# Altium PCB OpenUltrasound_Pulser.PcbDoc
Units mil, origin at the board's own origin, x right, y up, seen from the top; angles counter-clockwise.
Board outline 3533.46 x 2372.05 mil, 2 copper layers (Top Layer, Bottom Layer); 79 components, 64 nets, 307 pads, 84 vias.
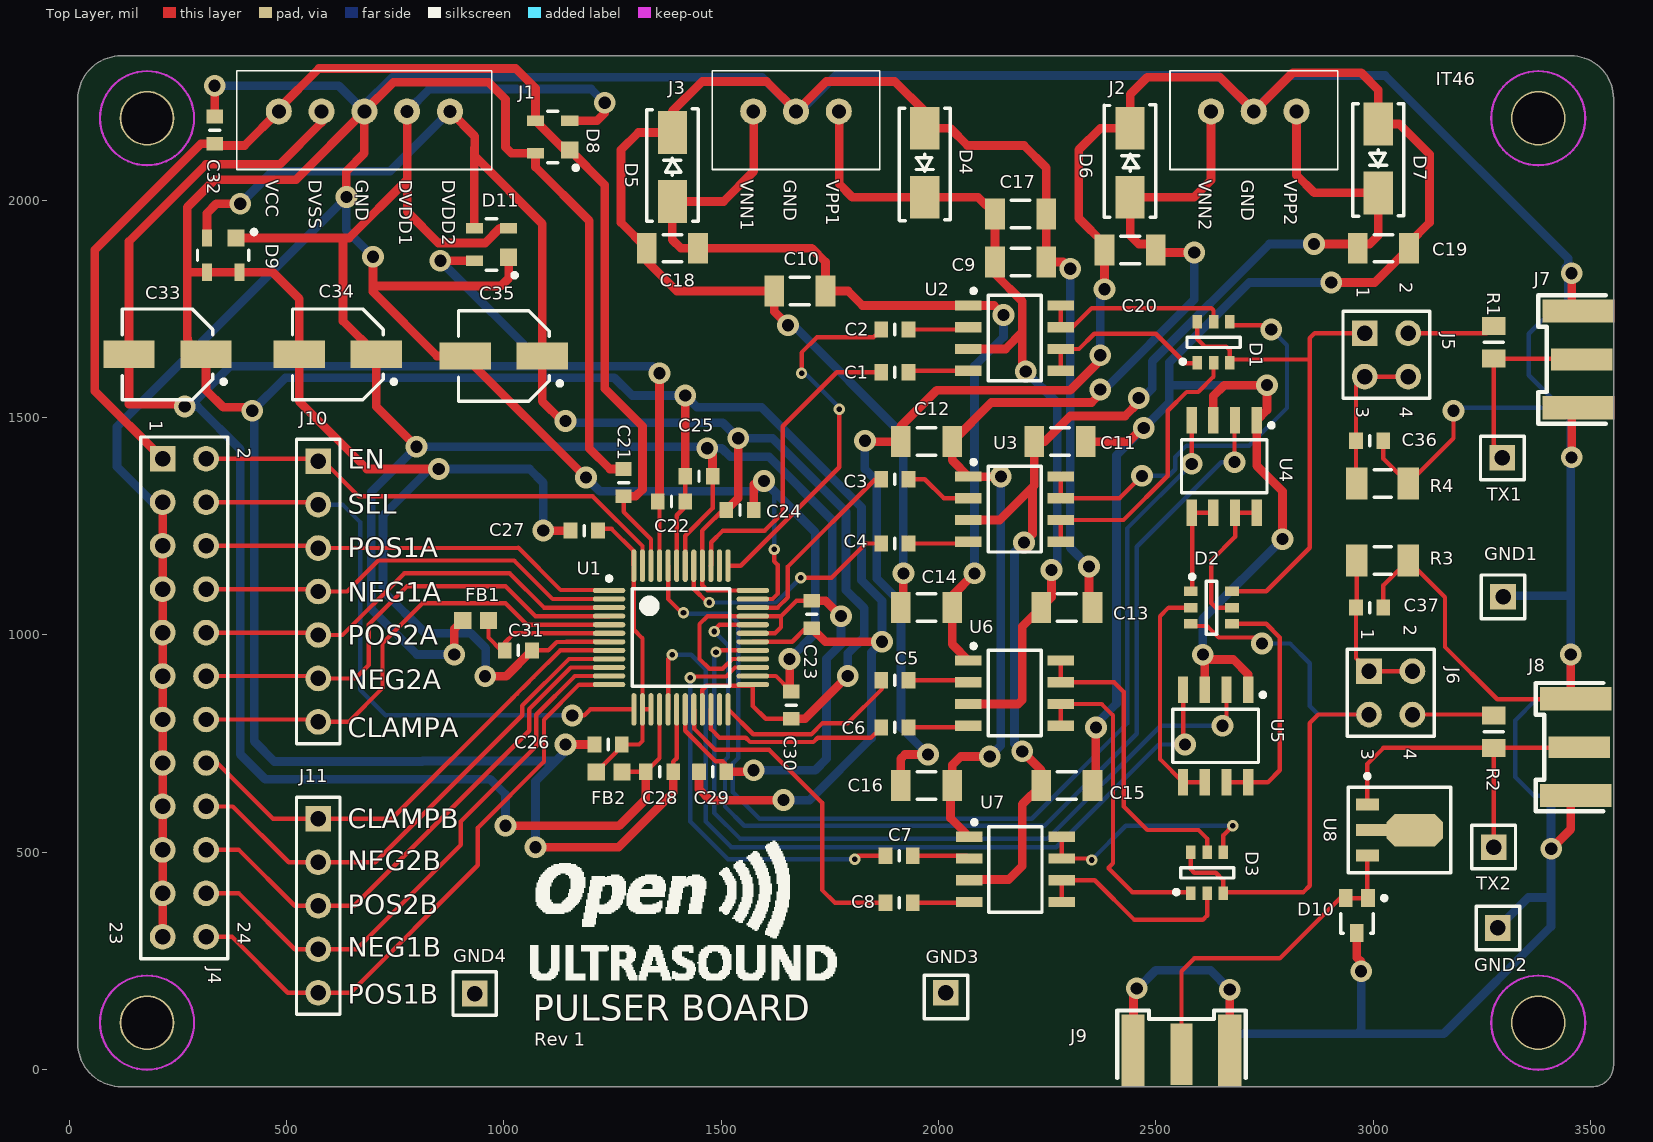
[diagram p0: Top Layer view]
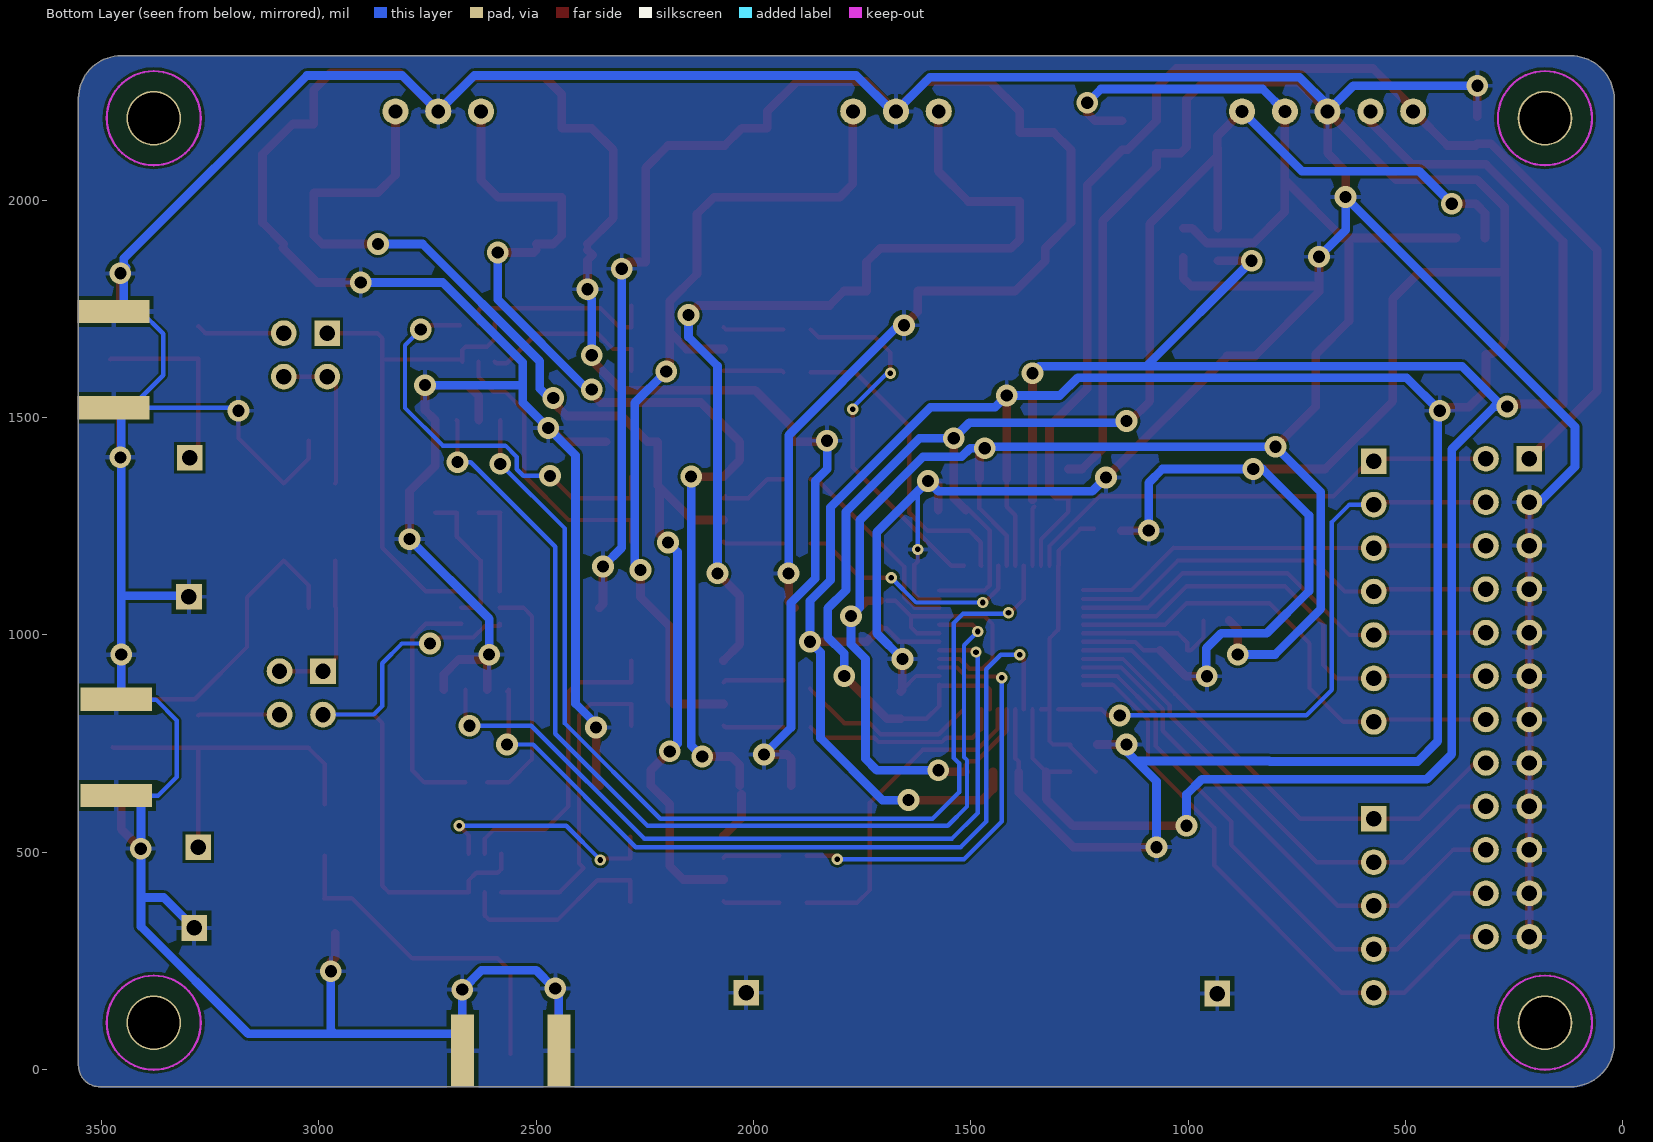
[diagram p1: Bottom Layer view, seen from below]
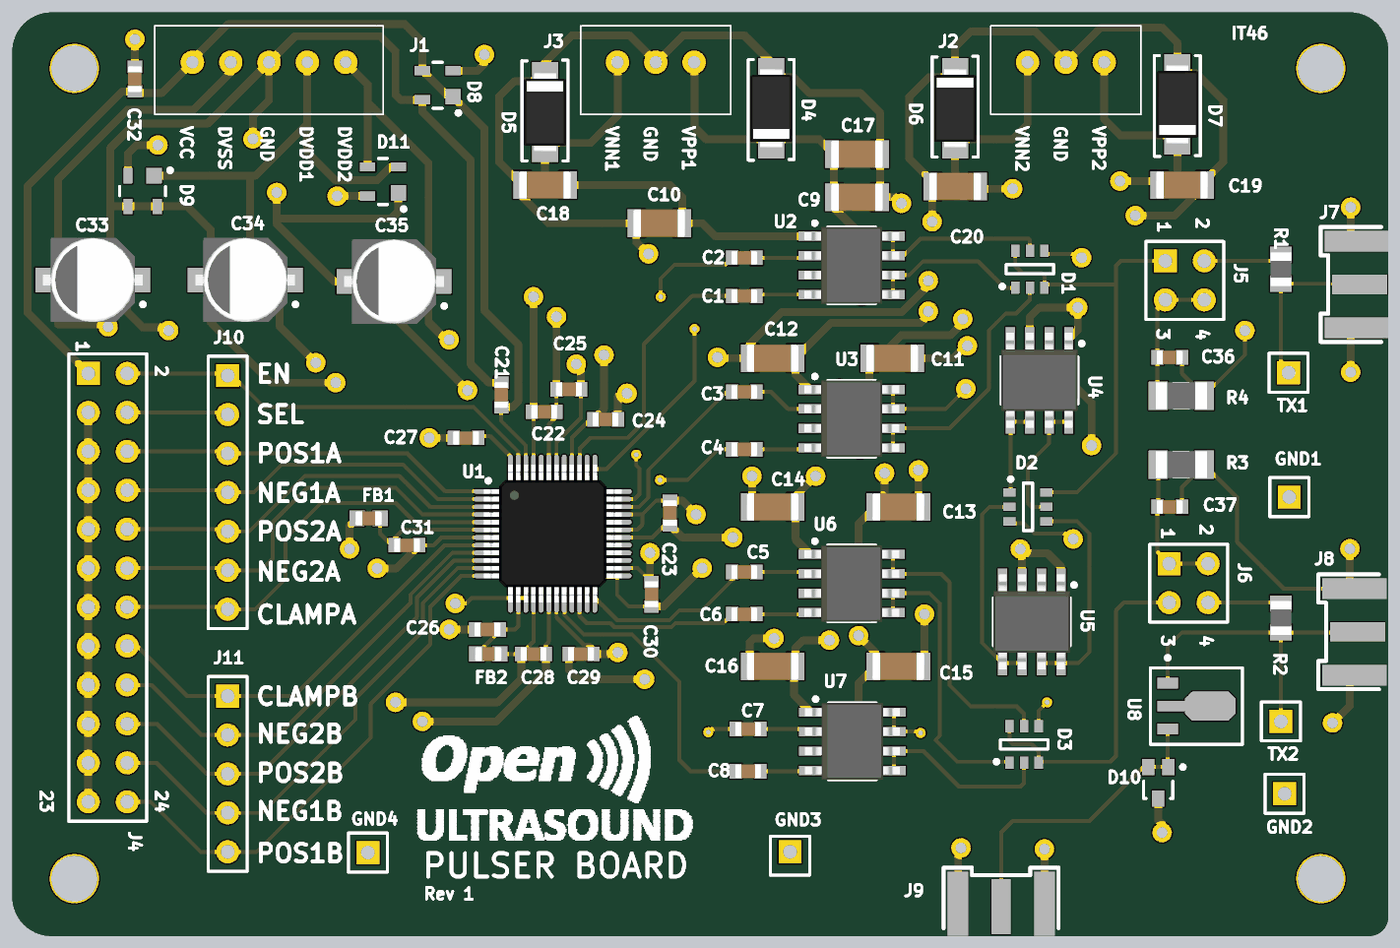
[diagram p2: 3D render of the assembled board from above, using the file's embedded part models]

## Layer stack, top to bottom
Top Solder: solder mask 0.4, Solder Resist, Dk 3.5
Top Layer: signal copper 1.4
Dielectric 1: dielectric 12.6, FR-4, Dk 4.8
Bottom Layer: signal copper 1.4
Bottom Solder: solder mask 0.4, Solder Resist, Dk 3.5

## Board outline
19.68,2224.41 19.68,2231.68 cw(c120.68,2231.68) 120.68,2332.68 3454.72,2332.68 cw(c3454.72,2234.25) 3553.15,2234.25 3553.15,9.84 cw(c3503.94,9.84) 3503.94,-39.37 127.95,-39.37 120.68,-39.37 cw(c120.68,61.63) 19.68,61.63 19.68,669.29

## Design rules (kind name [scope] priority, off if disabled: settings)
Clearance [All] p1: gap=6
HoleSize [All] p1: absolutevalues=TRUE maxlimit=150 minlimit=1 maxpercent=80.000 minpercent=20.000
PolygonConnect [All] p1: connectstyle=Relief reliefconductorwidth=10 reliefentries=4 polygonreliefangle="90 Angle" airgapwidth=10
RoutingVias [All] p1: holewidth=28 width=50 viastyle="Through Hole" minholewidth=28 minwidth=50 maxholewidth=28 maxwidth=50
SilkToSilkClearance [All] p1: silktosilkclearance=8
SilkToSolderMaskClearance [IsPad] p1: minsilkscreentomaskgap=1 clearancetoexposedcopper=TRUE
SolderMaskExpansion [All] p1: expansion=4
UnpouredPolygon [All] p1: allowunpoured=TRUE
Width [All] p1: maxlimit=25 minlimit=10 preferedwidth=10 minimp=50.000000 maximp=50.000000 favimp=50.000000
26 further rules are at their usual default settings.

## Components (designator, comment, footprint, x,y, rotation, side; value= is the part's Value field where it differs from the comment)
C1 "200V" CAP1608X100N 1899.61,1604.33 r0 top
C2 "200V" CAP1608X100N 1899.61,1702.76 r0 top
C3 "200V" CAP1608X100N 1899.61,1358.27 r0 top
C4 "200V" CAP1608X100N 1899.61,1210.63 r0 top
C5 "200V" CAP1608X100N 1899.61,895.67 r0 top
C6 "200V" CAP1608X100N 1899.61,787.4 r0 top
C7 "200V" CAP1608X100N 1909.45,492.13 r0 top
C8 "200V" CAP1608X100N 1909.45,383.86 r0 top
C9 "100V" CAP3216X180N 2188.98,1858.27 r180 top
C10 "100 V" CAP3216X180N 1681.1,1791.34 r180 top
C11 "100V" CAP3216X180N 2279.53,1444.88 r180 top
C12 "100V" CAP3216X180N 1972.44,1444.88 r0 top
C13 "100V" CAP3216X180N 2295.28,1062.99 r180 top
C14 "100V" CAP3216X180N 1972.44,1062.99 r0 top
C15 "100V" CAP3216X180N 2295.28,653.54 r180 top
C16 "100V" CAP3216X180N 1972.44,653.54 r0 top
C17 "100V" CAP3216X180N 2188.98,1968.5 r180 top
C18 "100V" CAP3216X180N 1387.8,1889.76 r0 top
C19 "100V" CAP3216X180N 3023.62,1889.76 r180 top
C20 "100V" CAP3216X180N 2440.94,1885.83 r0 top
C21 "16 V" CAP1608X100N 1275.59,1350.39 r270 top
C22 "16 V" CAP1608X100N 1385.83,1307.09 r180 top
C23 "16 V" CAP1608X100N 1708.66,1047.24 r90 top
C24 "16 V" CAP1608X100N 1543.31,1287.4 r180 top
C25 "16 V" CAP1608X100N 1449,1365 r0 top
C26 "16 V" CAP1608X100N 1240.16,748.03 r180 top
C27 "16 V" CAP1608X100N 1185.04,1240.16 r180 top
C28 "16 V" CAP1608X100N 1358.27,685.04 r180 top
C29 "16 V" CAP1608X100N 1480.31,685.04 r0 top
C30 "16 V" CAP1608X100N 1661.42,838.58 r270 top
C31 "16 V" CAP1608X100N 1033.46,964.57 r180 top
C32 "16 V" CAP1608X100N 334.65,2161.5 r270 top
C33 "10uF" CAPAE530X540N 226.38,1645.67 r180 top
C34 "10uF" CAPAE530X540N 618.11,1645.67 r180 top
C35 "10uF" CAPAE530X540N 1000,1641.73 r180 top
C36 "220 pF" CAP1608X100N 2992.13,1446.85 r180 top
C37 "220 pF" CAP1608X100N 2992.13,1062.99 r0 top
D1 "MMBD3004BRM" SOT26A-6AN 2632.87,1673.23 r90 top
D2 "MMBD3004BRM" SOT26A-6AN 2627.95,1062.99 r0 top
D3 "MMBD3004BRM" SOT26A-6AN 2618.11,452.76 r90 top
D4 "BD1100-13" "ST DO214AC SMA" 1968.5,2086.61 r270 top
D5 "BD1100-13" "ST DO214AC SMA" 1387.8,2076.77 r90 top
D6 "BD1100-13" "ST DO214AC SMA" 2440.94,2086.61 r90 top
D7 "BD1100-13" "ST DO214AC SMA" 3011.81,2096.46 r270 top
D8 "Device" SOT143L 1112.2,2145.67 r180 top
D9 "Device" SOT143L 354.33,1874.02 r270 top
D10 "BAT64-04W" SOT-323 2962.6,354.33 r180 top
D11 "Device" SOT143L 971.63,1898.53 r180 top
FB1 "Value" CAP1608X85N 935.04,1033.46 r180 top
FB2 "Value" CAP1608X85N 1242.13,685.04 r180 top
GND1 "Header 1" HDR1X1#1 3299,1088 r270 top
GND2 "Header 1" HDR1X1#1 3287,326 r270 top
GND3 "Header 1" HDR1X1#2 2017,167 r0 top
GND4 "Header 1" HDR1X1#1 933,175 r90 top
J1 "Header 5 - pin" B5B-XH-A 580.71,2204.72 r270 top
J2 "Header 3 - pin" B3B-XH-A 2726.38,2204.72 r270 top
J3 "Header 3 - pin" B3B-XH-A 1673.23,2204.72 r270 top
J4 "Header 12X2" HDR2X12 214.96,1405.51 r270 top
J5 "Header 2X2" HDR2X2 2980.71,1694.49 r270 top
J6 "Header 2X2" HDR2X2 2990.55,916.93 r270 top
J7 "SMA_EDGE_MOUNT" SMA-J-P-X-ST-EM1 3554.8,1634 r90 top
J8 "SMA_EDGE_MOUNT" SMA-J-P-X-ST-EM1 3549,742 r90 top
J9 "SMA_EDGE_MOUNT" SMA-J-P-X-ST-EM1 2559,-39 r0 top
J10 "Header 7" HDR1X7 573,1400 r270 top
J11 "Header 5" HDR1X5 573,577 r270 top
R1 "200" RESC2012X70N-0805 3277.56,1673.23 r270 top
R2 "200" RESC2012X70N-0805 3277.56,777.56 r270 top
R3 "1k" RESC3216X80N-1206 3021.65,1171.26 r0 top
R4 "1k" RESC3216X80N-1206 3021.65,1348.43 r180 top
TX1 "Header 1" HDR1X1#1 3297.24,1407.48 r180 top
TX2 "Header 1" HDR1X1#1 3277.56,511.81 r180 top
U1 "MD1712" LQFP-48 1407.48,994.09 r0 top
U2 "TC6320" SOIC127P600X175-8N 2175.2,1683.07 r0 top
U3 "TC6320" SOIC127P600X175-8N 2175.2,1289.37 r0 top
U4 "TC6320" SOIC127P600X175-8N 2657.48,1387.8 r270 top
U5 "TC6320" SOIC127P600X175-8N 2637.8,767.72 r270 top
U6 "TC6320" SOIC127P600X175-8N 2175.2,866.14 r0 top
U7 "TC6320" SOIC127P600X175-8N 2177.17,460.63 r0 top
U8 "MD0100" SOT89 3041.34,551.18 r270 top

## Footprints (in the part's own frame and the unit in brackets; to place one, negate y for a bottom-side part, rotate by r counter-clockwise, add the part's x,y. Pads: shape width x height; smd on the part's side, far side on the other; paste and mask are expansions set on the pad)
B3B-XH-A [mil]
  round 60 hole 32: 1(0,-99.41) 2(0,-0.98) 3(0,97.44)
  silkscreen extent -94,-194 134,192
B5B-XH-A [mil]
  round 60 hole 32: 1(0,-98.43) 2(0,0) 3(0,98.43)
  round 60 hole 30: 4(0,196.85) 5(0,295.28)
  silkscreen extent -94,-195 134,392
CAP1608X85N [mm] "Chip Capacitor, Body 1.6x0.8mm IPC Medium  - 0603"
  rect 1x1 smd: 1(-0.75,0) 2(0.75,0)
  body extent -0.87,-0.47 0.88,0.48, height 0.85
CAP1608X100N [mm] "Capacitor, non-Polarized, Chip; 1.60mm L X 0.80mm W X 1.00mm H, IPC Medium Density - 0603"
  rect 0.8x0.95 smd: 1(-0.8,0) 2(0.8,0)
  silkscreen extent 0,-0.3 0,0.3, body extent -0.85,-0.45 0.85,0.45, height 1
CAP3216X180N [mm] "Chip Capacitor, Body 3.2x1.6mm, IPC Medium Density - 1206"
  rect 1.15x1.8 smd: 1(-1.5,0) 2(1.5,0)
  silkscreen extent -0.55,-0.8 0.55,0.8, body extent -1.7,-0.9 1.7,0.9, height 1.8
CAPAE530X540N [mm] "Capacitor, Aluminium Electrolytric, 5.3mm L X 5.3mm W X 5.4mm H, IPC Medium Density"
  rect 3x1.6 smd: 1(-2.25,0) 2(2.25,0)
  silkscreen extent -3.4,-2.65 2.65,2.65, body extent -3.25,-2.75 3.25,2.75, height 5.7
HDR1X1#1 [mm] "Connector; Header; 1 Position"
  rect 1.5x1.5 hole 0.9: 1(0,0)
  silkscreen extent -1.27,-1.27 1.28,1.27
HDR1X1#2 [mm] "Connector; Header; 1 Position"
  rect 1.5x1.5 hole 0.9: 1(0,0.254)
  silkscreen extent -1.27,-1.27 1.28,1.27
HDR1X5 [mm] "Connector; Header; 5 Position"
  rect 1.5x1.5 hole 0.9: 1(0,0)
  round 1.5 hole 0.9: 2(2.54,0) 3(5.08,0) 4(7.62,0) 5(10.16,0)
  silkscreen extent -1.27,-1.27 11.43,1.27
HDR1X7 [mm] "Connector; Header; 7 Position"
  rect 1.5x1.5 hole 0.9: 1(0,0)
  round 1.5 hole 0.9: 2(2.54,0) 3(5.08,0) 4(7.62,0) 5(10.16,0) 6(12.7,0) 7(15.24,0)
  silkscreen extent -1.27,-1.27 16.51,1.27
HDR2X2 [mm] "Connector; Header; 2x2 Position"
  rect 1.5x1.5 hole 0.9: 1(0,0)
  round 1.5 hole 0.9: 2(0,2.54) 3(2.54,0) 4(2.54,2.54)
  silkscreen extent -1.27,-1.27 3.81,3.81
HDR2X12 [mm] "Connector; Header; 12x2 Position"
  rect 1.5x1.5 hole 0.9: 1(0,0)
  round 1.5 hole 0.9: 2(0,2.54) 3(2.54,0) 4(2.54,2.54) 5(5.08,0) 6(5.08,2.54) 7(7.62,0) 8(7.62,2.54) 9(10.16,0) 10(10.16,2.54) 11(12.7,0) 12(12.7,2.54) 13(15.24,0) 14(15.24,2.54) 15(17.78,0) 16(17.78,2.54) 17(20.32,0) 18(20.32,2.54) 19(22.86,0) 20(22.86,2.54) 21(25.4,0) 22(25.4,2.54) 23(27.94,0) 24(27.94,2.54)
  silkscreen extent -1.27,-1.27 29.21,3.81
LQFP-48 [mm] "TSQFP, 48-Leads, Body 9,0x9,0mm (max), Pitch 0,50mm, IPC Medium Density"
  oval 1.9x0.3 smd: 1(-4.2,2.75) 2(-4.2,2.25) 3(-4.2,1.75) 4(-4.2,1.25) 5(-4.2,0.75) 6(-4.2,0.25) 7(-4.2,-0.25) 8(-4.2,-0.75) 9(-4.2,-1.25) 10(-4.2,-1.75) 11(-4.2,-2.25) 12(-4.2,-2.75) 25(4.2,-2.75) 26(4.2,-2.25) 27(4.2,-1.75) 28(4.2,-1.25) 29(4.2,-0.75) 30(4.2,-0.25) 31(4.2,0.25) 32(4.2,0.75) 33(4.2,1.25) 34(4.2,1.75) 35(4.2,2.25) 36(4.2,2.75)
  oval 0.3x1.9 smd: 13(-2.75,-4.2) 14(-2.25,-4.2) 15(-1.75,-4.2) 16(-1.25,-4.2) 17(-0.75,-4.2) 18(-0.25,-4.2) 19(0.25,-4.2) 20(0.75,-4.2) 21(1.25,-4.2) 22(1.75,-4.2) 23(2.25,-4.2) 24(2.75,-4.2) 37(2.75,4.2) 38(2.25,4.2) 39(1.75,4.2) 40(1.25,4.2) 41(0.75,4.2) 42(0.25,4.2) 43(-0.25,4.2) 44(-0.75,4.2) 45(-1.25,4.2) 46(-1.75,4.2) 47(-2.25,4.2) 48(-2.75,4.2)
  silkscreen extent -4.32,-2.85 2.85,3.57, body extent -4.5,-4.5 4.5,4.5, height 1.5
RESC2012X70N-0805 [mm] "Chip Resistor, EIA 0805, Metric 2012, Body 2.0x1.25mm, IPC Medium Density"
  rect 1.05x1.4 smd: 1(-0.95,0) 2(0.95,0)
  silkscreen extent 0,-0.55 0,0.55, body extent -1.1,-0.67 1.1,0.68, height 0.7
RESC3216X80N-1206 [mm] "Chip Resistor, EIA 1206, Metric 3216, Body 3.2x1.6mm, IPC Medium Density"
  rect 1.25x1.85 smd: 1(-1.5,0) 2(1.5,0)
  silkscreen extent -0.5,-0.8 0.5,0.8, body extent -1.67,-0.87 1.68,0.88, height 0.8
SMA-J-P-X-ST-EM1 [mm]
  rect 1.27x3.6 smd mask+0.05: 1(0,1.9)
  rect 1.35x4.2 smd mask+0.05: 2(-2.825,2.1) 3(2.825,2.1)
  rect 1.35x4.2 smd far side mask+0.05: 4(-2.825,2.1) 5(2.8,2.1)
  silkscreen extent -3.75,0.5 3.75,4.45
SOIC127P600X175-8N [mm] "SOIC 8, Pitch 1.27mm - Body 4x5mm, IPC Medium Density"
  rect 1.55x0.6 smd: 1(-2.7,1.905) 2(-2.7,0.635) 3(-2.7,-0.635) 4(-2.7,-1.905) 5(2.7,-1.905) 6(2.7,-0.635) 7(2.7,0.635) 8(2.7,1.905)
  silkscreen extent -2.52,-2.5 1.55,2.88, body extent -3.1,-2.5 3.1,2.5, height 1.75
SOT26A-6AN [mm] "SOT23, 6-Leads, Body 2.9x1.6mm, Pitch 0.95mm, Lead Span 2.5mm, IPC Medium Density"
  rect 0.8x0.55 smd mask+0.06: 1(-1.2,0.95) 2(-1.2,0) 3(-1.2,-0.95) 4(1.2,-0.95) 5(1.2,0) 6(1.2,0.95)
  silkscreen extent -1.25,-1.55 0.3,1.92, body extent -0.9,-1.55 0.9,1.55, height 1.1
SOT89 [mm] "SOT-89; Body 4.6 x 4.25 mm, inc. leads (LxW max)"
  oct 1.9x3.3 smd: 0(0,1.388)
  rect 0.7x1.35 smd: 1(-1.5,-1.388) 3(1.5,-1.388)
  rect 0.7x1.8 smd: 2(0,-1.162)
  silkscreen extent -3.27,-2.51 2.5,3.49
SOT143L [mm] "SOT143, 4-Leads, Body 2.9x1.3mm, Pitch 1.9mm, Lead Span 2.5mm, IPC High Density"
  rect 1x1 smd: 1(-1,0.75)
  rect 1x0.6 smd: 2(-1,-0.95) 3(1,-0.95) 4(1,0.95)
  silkscreen extent -1.48,-1.5 0.3,1.92, body extent -0.7,-1.52 0.7,1.52, height 1.1
SOT-323 [mm] "SOT-323/SC-70; 3 Leads; Body 2.2 x 2.2 mm, inc. leads (LxW max)"
  rect 0.8x1.05 smd: 1(-0.65,-1.025) 2(0.65,-1.025) 3(0,1.025)
  silkscreen extent -1.73,-1.15 0.95,1.03
"ST DO214AC SMA" [mm] "Molded Diode, 2-Leads, Body 4.30x2.60mm, IPC Medium Density"
  rect 2.5x1.7 smd: 1(-2.015,0) 2(2.015,0)
  silkscreen extent -3.18,-1.5 3.39,1.5, body extent -2.6,-1.37 2.6,1.37, height 2.4

## Part data
C1 C2 C3 C4 C5 C6 C7 C8 C21 C22 C23 C24 C25 C26 C27 C28 C29 C30 C31 C32 C36 C37: library part CAP0603, "Capacitor"
C9 C10 C11 C12 C13 C14 C15 C16 C17 C18 C19 C20: library part CAP1206, "Capacitor"
C33 C34 C35: library part "CAP POL", "Polarized Capacitor (Radial Can SMD)"
D1 D2 D3: "High Voltage Surface Mount Switching Diode Array"
D8 D9 D11: library part "Diode Schottky x2 A4C1_A3C2", "Serial Schottky Diode"
D10: "Silicon AF Schottky Diode for Low-Loss, Fast-Recovery, Meter Protection"
FB1 FB2: library part "Ferrite Bead", "Ferrite Bead"
GND1 GND2 GND3 GND4 TX1 TX2: "Header, 1-Pin"
J1: library part B5B-XH-A, "Header, 5-pin"
J2 J3: library part B3B-XH-A, "Header, 3-pin"
J4: "Header, 12-Pin, Dual row"
J5 J6: "Header, 2-Pin, Dual row"
J7 J8 J9: "BNC Elbow Connector"
J10: "Header, 7-Pin"
J11: "Header, 5-Pin"
R1 R2: library part RES0805, "Resistor"
R3 R4: library part RES1206, "Resistor"
U1: "High Speed, Integrated Ultrasound Driver IC"
U8: "High voltage protection T/R switch"

## Free pads (board coordinates)
  round 125.98 hole 118.11: 7(179.13,108) 7(179.13,2188.98) 7(3379.92,108) 7(3379.92,2188.98)

## Via types
v1: diameter 50, hole 28, Top Layer to Bottom Layer, 71 vias
v2: diameter 26, hole 13, Top Layer to Bottom Layer, 13 vias

## Nets (pads, with @x,y where several pads share a name; then routed paths per layer and width w, separated by ;. In a path a pad name is that pad's centre, name@x,y a point inside that pad or via, vN(x,y) a via of type N, cw(c..) or ccw(c..) an arc to the next point about the centre after c; other vN are vias at no path point)
CLAMPA: J4.14 J10.7 U1.5 | length 1123.1
  Top Layer w10: J4.14 567.49,805.51 J10.7 643,800 721,878 721,980.84 812.99,1072.83 1003.94,1072.83 1053.15,1023.62 U1.5
CLAMPB: J4.16 J11.1 U1.8 | length 1140.9
  Top Layer w10: J4.16 340.49,705.51 469,577 J11.1 742.35,577 1019.69,854.33 1030.51,865.16 1052.17,886.82 1067.39,902.04 1129.92,964.57 U1.8
DVDD1: C23.2 C25.2 C29.2 C34.1 D8.2 D9.1 D11.2 FB1.2 J1.4 U1.19 U1.28 U1.31 U1.33 U1.42 | length 5846.3
  Top Layer w10: U1.19 1417.32,779.53 1487.73,709.12 1503.47,709.12 1511.81,700.79 C29.2 ; U1.42 1417.32,1228.35 1480.31,1291.34 C25.2@1480.31,1358.27 ; U1.28 1526.18,944.88 1503.93,922.63 1472.45,922.63 1450.19,944.89 1450.19,1024.99 1468.5,1043.31 U1.33 1637.8,1043.31 ; U1.31 1624.02,1003.94 1637.8,1017.72 1637.8,1043.31 ; C23.2@1692.91,1078.74 1673.23,1078.74 1637.8,1043.31
  Top Layer w20: D9.1 629.92,1913.39 ; J1.4 777.56,2047.24 ; v1(799.21,1433.07) 706.69,1525.59 C34.1 629.92,1722.44 629.92,1913.39 ; v1(886,955) 886,1013.95 FB1.2 ; D11.2 990.93,1935.93 957,1902 849,1902 777.56,1973.44 777.56,2047.24 ; D8.2 1214.57,2183.07 1232.28,2200.79 v1(1232.28,2224.41) ; v1(1468,1429.64) 1480.31,1417.32 C25.2@1480.31,1358.27 ; C29.2 v1@1568.89,685.04 ; v1@1574.8,679.13 v1(1574.8,688.98) ; C23.2 1740.16,1078.74 v1(1775.59,1043.31) ; 629.92,1913.39 643.7,1913.39 777.56,2047.24
  Bottom Layer w20: J1.4 828.83,2256 1200.69,2256 v1(1232.28,2224.41) ; v1(886,955) 800,955 695,1060 695,1328.86 v1(799.21,1433.07) 1464.57,1433.07 v1(1468,1429.64) 1501.68,1429.64 1521.56,1409.76 1609.93,1409.76 1755.91,1263.78 1755.91,1062.99 v1(1775.59,1043.31) 1775.59,978.35 1742.54,945.29 1742.54,714.98 1716.53,688.98 v1(1574.8,688.98)
DVDD2: C24.2 C30.2 C35.1 D9.2 D11.3 J1.5 U1.21 U1.25 U1.36 U1.40 | length 3842.8
  Top Layer w10: U1.21 1456.69,874.02 1465.94,883.26 1570.27,883.26 U1.25 1572.83,836.61 1602.36,807.09 C30.2 ; C24.2@1511.81,1295.28 1456.69,1240.16 U1.40 1456.69,1114.17 1468.5,1102.36 U1.36
  Top Layer w20: D9.2 316.93,1970.47 338.58,1992.13 v1(393.7,1992.13) ; J1.5 933,2147.71 933,2122 ; D11.3 932.26,2121.26 933,2122 ; C35.1 1088.58,1537.4 1133.86,1492.13 v1(1141.73,1492.13) ; C35.1@1088.58,1657.48 1088.58,1946.42 933,2102 933,2122 ; C24.2 1539.37,1314.96 v1(1539.37,1452.76) ; C30.2 1692.91,807.09 v1(1791.34,905.51)
  Bottom Layer w20: v1(393.7,1992.13) 468.5,2066.93 738.19,2066.93 J1.5 ; v1(1141.73,1492.13) 1145.67,1488.19 1503.94,1488.19 v1(1539.37,1452.76) 1618.11,1452.76 1787.4,1283.46 1787.4,1103.04 1829.08,1061.36 1829.08,995.07 1791.34,957.33 v1(1791.34,905.51)
DVSS: C22.2 C28.2 C33.2 D11.4 FB2.1 J1.2 U1.16 U1.45 | length 5271.7
  Top Layer w10: FB2.1 C28.2 1358.27,716.54 U1.16 ; C22.2@1354.33,1295.28 1358.27,1291.34 U1.45
  Top Layer w20: v1@251.96,1531.5 137.8,1531.5 C33.2 137.8,1905.51 314.96,2082.68 484.25,2082.68 580.71,2179.13 J1.2 ; v1(854,1861) 854.13,1861.13 D11.4 ; v1(1003.94,561.02) 1265.75,561.02 1326.77,622.05 C28.2 ; C22.2@1358.27,1311.02 v1(1358.27,1602.36)
  Bottom Layer w20: v1(854,1861) 1096,1619 1096,1618.11 ; v1(1003.94,561.02) 1003.94,633.06 969,668 451,668 393.7,725.3 393.7,1427.17 295.28,1525.59 v1(265.75,1525.59) 277.56,1525.59 370.08,1618.11 1096,1618.11 ; v1(1358.27,1602.36) 1342.52,1618.11 1096,1618.11
EN: J4.2 J10.1 U1.47 | length 1132.4
  Top Layer w10: J4.2 567.49,1405.51 J10.1 585,1400 666.1,1318.9 1204.72,1318.9 1318.9,1204.72 U1.47
GND: C9.1 C10.2 C11.1 C12.1 C13.1 C14.1 C15.1 C16.1 C17.1 C18.1 C19.1 C20.1 C21.1 C22.1 C23.1 C24.1 C25.1 C26.2 C27.2 C28.1 C29.1 C30.1 C31.1 C32.1 C33.1 C34.2 C35.2 C36.1 C37.2 D4.1 D5.2 D6.2 D7.1 D8.4 D9.3 D9.4 D10.3 D11.1 GND1.1 GND2.1 GND3.1 GND4.1 J1.3 J2.2 J3.2 J4.3 J4.5 J4.7 J4.9 J4.11 J4.13 J4.15 J4.17 J4.19 J4.21 J4.23 J7.2 J7.3 J7.4 J7.5 J8.2 J8.3 J8.4 J8.5 J9.2 J9.3 J9.4 J9.5 R3.2 R4.1 U1.7 U1.18 U1.26 U1.30 U1.35 U1.43 U4.1 U4.3 U5.1 U5.3 | length 35118.8
  Top Layer w10: C31.1 1102.36,964.57 1121.73,983.94 1143.7,983.94 ; 1143.7,984.25 U1.7 ; C28.1 1389.76,708.66 1397.64,716.54 U1.18 ; U1.43 1397.64,1275.59 1417.32,1295.28 C25.1@1417.32,1358.27 ; U1.26 1625.98,905.51 C30.1@1657.48,874.02 ; U1.30 1663.39,984.25 1694.88,1015.75 C23.1 ; U1.35 1618.11,1082.68 1629.92,1094.49 1629.92,1161.42 1622.05,1169.29 v2(1622.05,1196.85) ; C37.2 3023.62,1114.17 R3.2 3165.35,1086.61 3165.35,972.44 3285.43,852.36 J8.3@3454.72,852.36 ; C36.1 3023.62,1405.51 R4.1 3185.04,1452.76 v1(3185.04,1515.75)
  Top Layer w20: J4.23 J4.21 J4.19 J4.17 J4.15 J4.13 J4.11 J4.9 J4.7 J4.5 J4.3 ; C32.1 v1(334.65,2263.78) ; v1(421.26,1515.75) 421.26,1523.62 354.33,1523.62 314.96,1562.99 C33.1 cw(c314.96,1688.98) 271.65,1688.98 271.65,1834.65 ; v1(637.8,2007.87) 637.8,2066.93 679.13,2108.27 J1.3 ; v1(698.82,1870.08) 698.82,1803 ; v1(850.39,1381.89) 685.04,1381.89 529.53,1537.4 C34.2 529.53,1773.62 468.5,1834.65 D9.4 D9.3 271.65,1834.65 ; v1(957,905) 1005.39,905 C31.1 ; D11.1 1011,1821 993,1803 698.82,1803 ; v1(1072.83,511.81) 1263.78,511.81 1389.76,637.8 C28.1 ; v1(1090.55,1240.16) C27.2 ; v1(1141.73,748.03) C26.2 ; v1(1188.98,1362.2) 911.42,1639.76 C35.2 846.46,1641.73 698.82,1789.37 698.82,1803 ; C21.1 1244.09,1381.89 1196.85,1429.13 1196.85,1952.76 1072.83,2076.77 D8.4 1017.72,2108.27 1003.94,2122.05 1003.94,2232.28 964.57,2271.65 746.06,2271.65 J1.3 ; C25.1@1417.32,1358.27 v1(1417.32,1551.18) ; C29.1 1448.82,645.67 1474.41,620.08 v1(1643.7,620.08) ; C24.1 v1@1574.8,1346.46 ; v1(1653.54,1712.6) 1622.05,1744.09 C10.2 1397.64,1791.34 1328.74,1860.24 C18.1 1269.68,1948.82 1269.68,2116.14 1309.65,2156.1 D5.2 1387.8,2204.72 1456.69,2273.62 1604.33,2273.62 1673.23,2204.72 1742.13,2273.62 1899.61,2273.62 1968.5,2204.72 D4.1 2026.97,2165.94 2066.93,2125.98 2196.85,2125.98 2248.03,2074.8 C17.1 C9.1 2287.4,1858.27 v1(2303.15,1842.52) ; v1(1657.48,944.88) 1657.48,874.02 C30.1 ; C23.1 1740.16,984.25 v1(1870.08,984.25) ; v1(1830.71,1446.85) 1832.68,1444.88 C12.1 ; C16.1 1913.39,715.39 1923,725 v1(1976,725) ; C14.1 1905.51,1062.99 1919.29,1076.77 v1(1919.29,1141.73) ; C12.1@1913.39,1456.69 1913.39,1480.31 1996.06,1562.99 2303.15,1562.99 2383.86,1643.7 v1(2372.05,1643.7) ; C11.1 2437.01,1444.88 2468.5,1476.38 v1(2472.44,1476.38) ; v1(2346.46,1157.48) 2346.46,1070.87 C13.1 ; C15.1 2362.2,661.42 v1(2362.2,787.4) ; v1(2381.89,1795.28) 2381.89,1862.2 2370.08,1874.02 C20.1 ; C20.1@2381.89,1899.61 2322.83,1958.66 2322.83,2116.14 2372.64,2165.94 D6.2 2440.94,2244.09 2480.31,2283.46 2647.64,2283.46 2726.38,2204.72 2814.96,2293.31 2972.44,2293.31 3011.81,2253.94 D7.1 3060.43,2175.79 3129.92,2106.3 3129.92,1948.82 C19.1@3080.71,1899.61 ; J9.2@2448.82,43.31 2448.82,173.82 2456,181 v1(2456,187) ; U5.3 2612.8,943.5 2678.54,943.5 2712.8,909.25 U5.1 ; U4.3 2632.48,1549.8 2657.48,1574.8 v1(2755.91,1574.8) 2755.91,1517.52 U4.1 2732.48,1389.57 2791.34,1330.71 v1(2791.34,1220.47) ; J9.3@2670.28,43.31 v1(2670.28,184.06) ; v1(2903.54,1811.02) 3003.94,1811.02 C19.1 ; D10.3 2962.6,257.87 2972.44,248.03 v1(2972.44,226.38) ; v1(3410,508) 3454.72,552.72 J8.2@3454.72,629.92 ; J8.3@3454.72,852.36 v1(3454.72,955.28) ; v1(3456.69,1408.69) J7.2@3456.69,1523.62 ; J7.3@3456.69,1745.08 v1(3456.69,1832.31) ; 271.65,1834.65 271.65,1984.25 334.65,2047.24 521.65,2047.24 J1.3
  Bottom Layer w10: v2(1622.05,1196.85) 1622.05,1330.71 ; v1(3185.04,1515.75) 3191.93,1522.64 3433.07,1522.64 3358.27,1597.44 3358.27,1692.91 3410.43,1745.08 J7.5@3456.69,1745.08 ; J8.4@3409.45,629.92 3370.08,629.92 3326.77,673.23 3326.77,803.15 3375,851.38 J8.5@3454.72,851.38
  Bottom Layer w20: J4.3 191.49,1305.51 110,1387 110,1479 v1@637.8,2006.8 ; v1(334.65,2263.78) 620.08,2263.78 J1.3 679.13,2218.5 743.63,2283 1593.97,2283 J3.2 1681.1,2204.72 1763.78,2287.4 2642.72,2287.4 J2.2 2808.07,2287.4 3027.56,2287.4 3448.82,1866.14 v1@3448.82,1840.18 ; v1(637.8,2007.87) v1@637.8,2006.8 ; v1(698.82,1870.08) 637.8,1931.1 v1@637.8,2006.8 ; v1(957,905) 958.49,906.49 958.49,969.51 924,1004 819,1004 722,1101 722,1275 828.89,1381.89 v1(850.39,1381.89) 1059.06,1381.89 1090.55,1350.39 v1(1090.55,1240.16) ; v1(1072.83,511.81) 1072.83,663.39 1141.73,732.28 v1(1141.73,748.03) ; 1119.45,710 813.62,710 812.62,709 472,709 425.64,755.36 425.64,1511.37 v1(421.26,1515.75) 497.62,1592.11 1254.35,1592.11 1295.28,1551.18 v1(1417.32,1551.18) 1444.5,1524 1593,1524 1822.83,1294.17 1822.83,1125.98 1870.08,1078.74 v1(1870.08,984.25) 1846,960.17 1846,763 1703.08,620.08 v1(1643.7,620.08) ; v1(1188.98,1362.2) 1220.47,1330.71 1574.8,1330.71 v1(1598.43,1354.33) 1622.05,1330.71 1716.54,1236.22 1716.54,1003.94 v1(1657.48,944.88) ; v1(1653.54,1712.6) 1666.4,1712.6 1919.29,1459.71 v1@1919.29,1139.76 ; v1(1830.71,1446.85) 1830.71,1381.89 1858.27,1354.33 1858.27,1129.92 1914,1074.19 1914,787 v1(1976,725) ; v1(2303.15,1842.52) 2303.15,1200.79 v1(2346.46,1157.48) ; v1(2362.2,787.4) 2362.2,795.28 2409.45,842.52 2409.45,1413.39 v1(2472.44,1476.38) 2531,1534.94 2531,1627 2715.02,1811.02 v1@2885.83,1811.02 ; v1(2372.05,1643.7) 2372.05,1771.65 2381.89,1781.5 v1(2381.89,1795.28) ; J9.4@2447.83,82.68 v1@2447.83,170.82 ; v1(2456,187) 2456,180 2457,179 v1@2466,188 ; v1@2462.83,191.17 2500,228.35 2625.98,228.35 v1(2670.28,184.06) J9.5@2670.28,82.68 ; 2539.37,1574.8 v1(2755.91,1574.8) ; v1(2608.27,954.72) 2608.27,1037.4 v1(2791.34,1220.47) ; J9.5@2670.28,43.31 J9.5@2670.28,82.68 ; v1(2972.44,226.38) 2972.44,90.55 2968.5,86.61 2972.44,82.68 ; GND2.1 3357,396 3409.45,396 ; GND1.1 3301,1090 3454.72,1090 ; v1@3409.45,507 3409.45,396 ; v1@3409.45,508 J8.4@3409.45,629.92 ; v1@3410,507 v1(3410,508) ; v1@3443,1846 v1@3448.82,1840.18 ; v1@3450,1402 v1@3454.72,1406.72 ; v1@3454,956 v1(3454.72,955.28) ; J8.5@3454.72,851.38 v1(3454.72,955.28) ; J7.4@3454.72,1520.67 v1@3454.72,1406.72 ; v1(3456.69,1408.69) v1@3454.72,1406.72 ; J7.5@3456.69,1745.08 3448.82,1752.95 v1@3448.82,1840.18 ; v1(3456.69,1832.31) v1@3448.82,1840.18 ; J9.5@2670.28,82.68 2972.44,82.68 ; 2972.44,82.68 3162.68,82.68 3409.45,329.45 3409.45,396 ; v1(3454.72,955.28) 3454.72,1090 ; 3454.72,1090 v1@3454.72,1406.72
NEG1A: J4.8 J10.4 U1.2 | length 995.7
  Top Layer w10: J4.8 567.49,1105.51 J10.4 640,1100 711.26,1171.26 1023.62,1171.26 1112.2,1082.68 U1.2
NEG1B: J4.22 J11.4 U1.11 | length 1314.5
  Top Layer w10: J4.22 390.49,405.51 519,277 J11.4 661,277 901,517 901,571 1074.52,744.52 1074.52,816.52 1163.51,905.51 U1.11
NEG2A: J4.12 J10.6 U1.4 | length 1100.4
  Top Layer w10: J4.12 567.49,905.51 J10.6 658,900 689,931 689,1024 777.2,1112.2 1003.94,1112.2 1072.83,1043.31 U1.4
NEG2B: J4.18 J11.2 U1.9 | length 1187.1
  Top Layer w10: J4.18 376.49,605.51 505,477 J11.2 704.1,477 1042.52,815.42 1042.52,837.52 1149.88,944.88 U1.9
NetC1_1: C1.1 U1.39 | length 723.7
  Top Layer w10: U1.39 1477.16,1160.23 1477.16,1213.38 1503.94,1240.16 1600.53,1240.16 1641.73,1281.36 1641.73,1480.32 1765.75,1604.33 C1.1
NetC1_2: C1.2 U2.4 | length 139.3
  Top Layer w10: C1.2 1934.84,1608.07 U2.4
NetC2_1: C2.1 U1.37 | length 859
  Top Layer w10: U1.37 1545.28,1159.45 1771.65,1385.83 v2(1771.65,1519.69) ; v2(1685.04,1602.36) 1685.04,1649.61 1720.47,1685.04 1850.39,1685.04 C2.1
  Bottom Layer w10: v2(1685.04,1602.36) 1692.91,1602.36 1771.65,1523.62 v2(1771.65,1519.69)
NetC2_2: C2.2 U2.2 | length 140
  Top Layer w10: C2.2 2063.58,1702.76 U2.2
NetC3_1: C3.1 U1.34 | length 459.1
  Top Layer w10: U1.34 1629.92,1062.99 1653.54,1086.61 1653.54,1157.48 1854.33,1358.27 C3.1
NetC3_2: C3.2 U3.2 | length 162.4
  Top Layer w10: C3.2 1968.5,1358.27 2012.4,1314.37 U3.2 U3.2@2064.37,1318.9
NetC4_1: C4.1 U1.41 | length 553.6
  Top Layer w10: U1.41 1437.01,1106.3 1468.5,1074.8 v2(1472.44,1074.8) ; v2(1683.07,1131.89) 1753.94,1131.89 1832.68,1210.63 C4.1
  Bottom Layer w10: v2(1472.44,1074.8) 1625.98,1074.8 v2(1683.07,1131.89)
NetC4_2: C4.2 U3.4 | length 139.3
  Top Layer w10: C4.2 2065.16,1210.63 U3.4
NetC5_1: C5.1 U1.24 | length 420
  Top Layer w10: U1.24@1516.97,828.74 1574.06,771.65 1707.55,771.65 1733.14,797.24 1791.34,797.24 1870.08,875.98
NetC5_2: C5.2 U6.2 | length 139.7
  Top Layer w10: C5.2 2064.37,895.67 U6.2
NetC6_1: C6.1 U1.22 | length 463.3
  Top Layer w10: U1.22 1476.38,783.46 1496.06,763.78 1556.47,763.78 1566.6,753.65 1712.18,753.65 1722.31,763.78 1844.49,763.78 C6.1
NetC6_2: C6.2 U6.4 | length 139.3
  Top Layer w10: C6.2 2065.16,787.4 U6.4
NetC7_1: C7.1 U1.27 | length 972.2
  Top Layer w10: v2(1429.13,901.57) 1432.19,904.63 1511.38,904.63 1531.95,925.2 U1.27 ; v2(1807.09,484.25) 1814.96,492.13 C7.1
  Bottom Layer w10: v2(1429.13,901.57) 1429.13,570.87 1515.75,484.25 v2(1807.09,484.25)
NetC7_2: C7.2 U7.2 | length 129.8
  Top Layer w10: C7.2 2064.37,492.13 U7.2@2068.9,487.6
NetC8_1: C8.1 U1.20 | length 768.3
  Top Layer w10: U1.20 1437.79,827.96 1437.79,784.52 1486.65,735.65 1610.8,735.65 1732.28,614.17 1732.28,413.39 1761.81,383.86 C8.1
NetC8_2: C8.2 U7.4 | length 129.5
  Top Layer w10: C8.2 2065.16,383.86 U7.4@2068.9,387.6
NetC26_1: C26.1 C27.1 FB2.2 U1.14 U1.15 U1.48 | length 706.2
  Top Layer w10: FB2.2 1271.65,744.09 C26.1 1311.02,748.03 1318.9,755.91 U1.14 ; C27.1@1216.54,1244.09 1248.03,1244.09 1297.99,1194.13 U1.48@1297.99,1159.45 ; U1.48 1299.21,1011.81 1318.9,992.13 U1.14 ; U1.15 U1.14
NetC31_2: C31.2 FB1.1 U1.6 | length 355.7
  Top Layer w10: FB1.1 964.57,994.09 994.09,964.57 C31.2 1001.97,982.28 1023.31,1003.62 1100.39,1003.62 ; 1100.39,1003.94 U1.6
NetC36_2: C36.2 J5.3 J5.4 R4.2 | length 355.2
  Top Layer w10: R4.2 2960.63,1350.39 C36.2 2960.63,1574.41 J5.3 J5.4
NetC37_1: C37.1 J6.1 J6.2 R3.1 | length 367.5
  Top Layer w10: R3.1 2962.6,1064.96 C37.1 2960.63,946.85 J6.1 J6.2
NetD1_1: D1.1 U2.5 U2.6 | length 408.2
  Top Layer w10: U2.5 U2.6 2323.43,1658.07 2358.27,1692.91 2500,1692.91 2567.91,1625 2591.54,1625 D1.1@2595.47,1628.94
NetD1_2: D1.2 U3.5 U3.6 | length 660.2
  Top Layer w10: U3.5 U3.6 2425.79,1264.37 2527.56,1366.14 2527.56,1515.75 2570.87,1559.06 2597.44,1559.06 2632.87,1594.49 D1.2@2632.87,1628.94
NetD1_3: D1.3 D1.6 D2.6 J5.1 | length 1171.6
  Top Layer w10: D1.6@2595.47,1717.52 2595.47,1681.1 2613.19,1663.39 2662.4,1663.39 2670.28,1655.51 2670.28,1628.94 2675.2,1633.86 2854.33,1633.86 ; D2.6@2672.24,1100.39 2753.94,1100.39 2854.33,1200.79 2854.33,1633.86 ; J5.1 2865.75,1694.49 2854.33,1683.07 2854.33,1633.86
NetD1_4: D1.4 U3.7 U3.8 | length 955.6
  Top Layer w10: U3.8 U3.7 2416.73,1314.37 v1@2463.29,1360.93 ; D1.4@2675.2,1712.6 2755.91,1712.6 v1(2765.75,1702.76)
  Bottom Layer w10: v1(2468.5,1366.14) 2529.66,1366.14 2544.68,1381.16 2544.68,1409.44 2570.87,1435.64 2715.17,1435.64 2801.75,1522.22 2801.75,1666.76 v1(2765.75,1702.76)
NetD1_5: D1.5 U2.7 U2.8 | length 451.1
  Top Layer w10: U2.8 U2.7 2308.46,1708.07 2352.36,1751.97 2627.95,1751.97 2632.87,1747.05 D1.5@2632.87,1717.52
NetD2_1: D2.1 U4.5 U4.6 | length 231.6
  Top Layer w10: D2.1@2583.66,1100.39 2583.66,1280.31 U4.5 U4.6
NetD2_2: D2.2 U5.5 U5.6 | length 535.8
  Top Layer w10: D2.2@2583.66,1062.99 2529.53,1062.99 2509.84,1043.31 2509.84,714.37 U5.5 U5.6
NetD2_3: D2.3 D3.3 D3.6 J6.3 | length 1486.1
  Top Layer w10: D3.6@2580.71,497.05 2580.71,460.63 2588.58,452.76 2637.8,452.76 2655.51,435.04 2655.51,408.46 2839.57,408.46 2854.33,423.23 2854.33,797.24 2874.02,816.93 J6.3 ; D2.3@2583.66,1025.59 2583.66,1020.67 2618.11,1020.67 2644.68,994.09 2730.31,994.09 v1(2744.09,980.32)
  Bottom Layer w10: v1(2744.09,980.32) 2744.09,962.6 2726.38,980.32 2809.06,980.32 2854.33,935.04 2854.33,836.61 2874.02,816.93 J6.3
NetD2_4: D2.4 U5.7 U5.8 | length 565.4
  Top Layer w10: U5.7 U5.8 2757.87,661.42 2785.43,688.98 2785.43,994.09 2753.94,1025.59 D2.4@2672.24,1025.59
NetD2_5: D2.5 U4.7 U4.8 | length 329.6
  Top Layer w10: D2.5@2672.24,1062.99 2637.8,1062.99 2627.95,1072.83 2627.95,1171.26 2682.48,1225.79 U4.7 U4.8
NetD3_1: D3.1 U6.5 U6.6 | length 748.8
  Top Layer w10: U6.5 U6.6 2375.39,841.14 2401.57,814.96 2401.57,474.93 2391.73,465.09 2391.73,462.6 2445.87,408.46 D3.1@2580.71,408.46
NetD3_2: D3.2 U7.5 U7.6 | length 480.6
  Top Layer w10: U7.5 U7.6 2359.65,435.63 2450.79,344.49 2608.27,344.49 2618.11,354.33 D3.2@2618.11,408.46
NetD3_4: D3.4 U7.7 U7.8 | length 550.6
  Top Layer w10: U7.8 U7.7 2349.02,485.63 v2(2352.36,482.28) ; D3.4@2655.51,497.05 2655.51,539.37 v2(2677.17,561.02)
  Bottom Layer w10: v2(2352.36,482.28) 2431.1,561.02 v2(2677.17,561.02)
NetD3_5: D3.5 U6.7 U6.8 | length 724.6
  Top Layer w10: U6.8 U6.7 2404.13,891.14 2426.18,869.09 2426.18,605.32 2480.31,551.18 2598.43,551.18 2618.11,531.5 D3.5@2618.11,497.05
NetD10_1: D10.1 D10.2 J9.1 U8.3 | length 787.5
  Top Layer w10: J9.1 2559,226.32 2588.58,255.91 2785.43,255.91 2924.21,394.69 D10.2 D10.1 2986.71,396.16 U8.3
NetJ5_2: J5.2 R1.1 | length 203.5
  Top Layer w10: J5.2 3261.42,1694.49 R1.1
NetJ6_4: J6.4 R2.1 | length 187.8
  Top Layer w10: J6.4 3275.59,816.93 R2.1
NetJ7_1: J7.1 R1.2 TX1.1 | length 439.7
  Top Layer w10: TX1.1 3297.24,1417.32 3277.56,1437.01 R1.2 3478.17,1635.83 J7.1
NetJ8_1: J8.1 R2.2 TX2.1 U8.1 | length 824.9
  Top Layer w10: U8.1 2986.71,703.25 3023.62,740.16 R2.2 ; TX2.1 R2.2 ; J8.1 3472.35,740.16 R2.2
NetU1_17: U1.17 U5.4 | length 1929.3
  Top Layer w10: U1.17 1377.95,944.88 v2(1387.8,954.72) ; v1(2566.93,748.03) 2562.8,752.17 U5.4 U5.4@2566.93,869.88
  Bottom Layer w10: v2(1387.8,954.72) 1431.1,954.72 1464.57,921.26 1464.57,570.87 1523.62,511.81 2270.81,511.81 2507.03,748.03 v1(2566.93,748.03)
NetU1_29: U1.29 U5.2 | length 1845.9
  Top Layer w10: v2(1488.19,960.63) 1492.12,964.57 U1.29 ; v1(2653.54,791.34) 2662.8,800.59 U5.2
  Bottom Layer w10: v2(1488.19,960.63) 1484.25,956.69 1484.25,590.55 1543.31,531.5 2251.5,531.5 2511.34,791.34 v1(2653.54,791.34)
NetU1_32: U1.32 U4.2 | length 2401.8
  Top Layer w10: v2(1484.25,1007.87) 1484.25,1011.81 1496.06,1023.62 U1.32 ; v1(2681.1,1397.64) 2681.1,1492.72 U4.2
  Bottom Layer w10: v2(1484.25,1007.87) 1515.75,976.37 1515.75,718.96 1508.96,712.17 1508.96,605.22 1553.15,561.02 2244.02,561.02 2456,773 2456,1203 2650.64,1397.64 v1(2681.1,1397.64)
NetU1_44: U1.44 U4.4 | length 2443.7
  Top Layer w10: U1.44 1377.95,1082.68 1413.39,1047.24 v2(1413.39,1051.18) ; U4.4 2582.68,1493.9 v1(2582.68,1393.7)
  Bottom Layer w10: v2(1413.39,1051.18) 1415.76,1048.8 1518.13,1048.8 1539.37,1027.56 1539.37,717.13 1526.96,704.72 1526.96,638.4 1588.33,577.02 2214.82,577.02 2434,796.2 2434,1245.02 v1(2582.68,1393.7)
POS1A: J4.6 J10.3 U1.1 | length 970
  Top Layer w10: J4.6 567.49,1205.51 J10.3 1032.68,1200 1033.46,1200.79 1130.67,1103.58 U1.1@1242.13,1103.58
POS1B: J4.24 J11.5 U1.12 | length 1394.9
  Top Layer w10: J4.24@324.8,295.67 J4.24 374.49,305.51 503,177 J11.5 647,177 940,470 940,556.14 1092.52,708.66 1092.52,805.12 1173.23,885.83 U1.12
POS2A: J4.10 J10.5 U1.3 | length 1020.8
  Top Layer w10: J4.10 567.49,1005.51 J10.5 629,1000 770.73,1141.73 1013.78,1141.73 1092.52,1062.99 U1.3
POS2B: J4.20 J11.3 U1.10 | length 1236.8
  Top Layer w10: J4.20 390.49,505.51 519,377 J11.3 656,377 1058.52,779.52 1058.52,829.52 1154.2,925.2 U1.10
SEL: J4.4 J10.2 U1.13 | length 1419.2
  Top Layer w10: J4.4 567.49,1305.51 J10.2 ; v1(1157.48,814.96) 1185.04,814.96 1198.82,828.74 U1.13
  Bottom Layer w10: J10.2 629.13,1300 669.29,1259.84 669.29,874.02 728.35,814.96 v1(1157.48,814.96)
VCC: C21.2 C32.2 D8.1 D8.3 J1.1 J4.1 U1.46 | length 3024.6
  Top Layer w10: C21.2 1275.59,1283.46 1338.58,1220.47 U1.46
  Top Layer w20: J4.1 59.06,1561.42 59.06,1885.91 303.15,2130.01 C32.2 338.67,2125.98 403.54,2125.98 J1.1 482.28,2210.63 574.8,2303.15 1027.56,2303.15 1072.83,2257.87 D8.3 1139.76,2116.14 D8.1 1232.28,2035.43 1232.28,1566.93 1318.9,1480.32 1318.9,1334.65 1303.15,1318.9 C21.2
VNN1: C10.1 C14.2 C18.2 D5.1 J3.1 U2.1 U6.1 | length 2173.8
  Top Layer w20: J3.1@1574.8,2204.72 1574.8,2066.93 1505.31,1997.44 D5.1 1387.8,1909.45 1407.48,1889.76 C18.2 1708.66,1889.76 1740.16,1858.27 C10.1 1791.73,1791.34 1825,1758.07 U2.1 2127.76,1758.07 v1(2149.61,1736.22) ; U6.1 2031.5,978.54 C14.2 2031.5,1090.55 v1(2082.68,1141.73)
  Bottom Layer w20: v1(2082.68,1141.73) 2082.68,1618.7 2149.61,1685.63 v1(2149.61,1736.22)
VNN2: C12.2 C16.2 C20.2 D6.1 J2.1 U3.1 U7.1 | length 2518.8
  Top Layer w20: C16.2@2027.56,633.86 2027.56,578.94 U7.1@2068.9,537.6 ; C16.2 2031.5,700.79 2051.18,720.47 v1(2118.11,720.47) ; v1(2143.5,1364.37) U3.1 2031.5,1401.77 C12.2 2121.61,1534.99 2351.92,1534.99 2376.97,1560.04 2385.83,1568.9 2381.89,1564.96 v1(2372.05,1564.96) ; C20.2 2505.91,1879.92 v1(2588.58,1879.92) ; C20.2@2500,1899.61 2460.63,1899.61 2440.94,1919.29 D6.1 2587.99,2007.28 2626.97,2046.26 J2.1
  Bottom Layer w20: v1(2118.11,720.47) 2143.5,745.87 v1(2143.5,1364.37) ; v1(2372.05,1564.96) 2381.89,1564.96 2588.58,1771.65 v1(2588.58,1879.92)
VPP1: C9.2 C13.2 C17.2 D4.2 J3.3 U2.3 U6.3 | length 2032.6
  Top Layer w20: J3.3@1771.65,2204.72 1771.65,2037.4 1801.77,2007.28 D4.2 2091.14,2007.28 C17.2 C9.2 2129.92,1830.71 2192.91,1767.72 2192.91,1696.85 ; U6.3 2183.66,841.14 2192.91,850.39 2192.91,1019.69 C13.2 2259.84,1086.61 v1(2259.84,1149.61) ; U2.3 2154.13,1658.07 2192.91,1696.85 ; v1(2200.79,1606.3) 2192.91,1614.17 2192.91,1696.85
  Bottom Layer w20: v1(2200.79,1606.3) 2273,1534.09 2273,1162.76 v1(2259.84,1149.61)
VPP2: C11.2 C15.2 C19.2 D7.2 J2.3 U3.3 U7.3 | length 2834.1
  Top Layer w20: U7.3@2068.9,437.6 2162.01,437.6 2192.91,468.5 2192.91,610.24 C15.2 2236.22,688.98 v1(2192.91,732.28) ; U3.3 2141.14,1264.37 2216.54,1339.76 ; v1(2196.85,1212.6) 2216.54,1232.28 2216.54,1339.76 ; v1(2460.63,1545.28) 2460.63,1535.43 2429.13,1503.94 2303.15,1503.94 2244.09,1444.88 C11.2 2220.47,1343.7 2216.54,1339.76 ; J2.3 2823.82,2058.07 2864.76,2017.13 D7.2 3011.81,1919.29 2992.13,1899.61 v1(2864.17,1899.61)
  Bottom Layer w20: v1(2192.91,732.28) 2175,750.2 2175,1190.75 v1(2196.85,1212.6) ; v1(2460.63,1545.28) 2470.47,1545.28 2492.13,1566.93 2492.13,1629.92 2761.81,1899.61 v1(2864.17,1899.61)
pads on no net: U1.23 U1.38 U8.0 U8.2

## Polygon pours and split planes (outlines as drawn)
GND on Bottom Layer "GND" (solid, remove dead copper, pour order 2): 137,2332 3452,2332 cw(c3452,2232) 3552,2232 3552,1329 3552,14 cw(c3496,14) 3496,-42 122,-42 cw(c122,58) 22,58 22,964 22,2234 cw(c118,2236) 116,2332 130,2332

## Keep-outs
Keep-Out Layer:
  circle w5: c179.13,108.11 r108.27
  circle w5: c179.13,2188.98 r108.27
  circle w5: c3379.92,108 r108.27
  circle w5: c3379.92,2188.98 r108.27

## Silkscreen, mask and mechanical layers (free items; w line width, h text height)
Top Overlay:
  drawing of 844 lines, arcs and shapes, not listed
  text "IT46" at 3144,2265 h30
  text "VCC" at 452.76,2047.24 h30 r270
  text "DVSS" at 551.18,2047.24 h30 r270
  text "GND" at 659.45,2047.24 h30 r270
  text "DVDD1" at 759.84,2047.24 h30 r270
  text "DVDD2" at 858.27,2047.24 h30 r270
  text "VNN1" at 1545.28,2047.24 h30 r270
  text "GND" at 1643.7,2047.24 h30 r270
  text "VPP1" at 1742.13,2047.24 h30 r270
  text "VNN2" at 2598.43,2047.24 h30 r270
  text "GND" at 2696.85,2047.24 h30 r270
  text "VPP2" at 2795.28,2047.24 h30 r270
  text "EN" at 641,1383 h45
  text "SEL" at 641,1279 h45
  text "POS1A" at 641,1179 h45
  text "NEG1A" at 641,1077 h45
  text "POS2A" at 641,978 h45
  text "NEG2A" at 641,875 h45
  text "CLAMPA" at 641,765 h45
  text "CLAMPB" at 641,555 h45
  text "NEG2B" at 641,459 h45
  text "POS2B" at 641,358 h45
  text "NEG1B" at 641,260 h45
  text "POS1B" at 641,152 h45
  text "PULSER BOARD" at 1067,113 h60
  text "Rev 1" at 1070,55 h30

## Text inside footprints (layer, text, board x,y; h text height)
J4: Top Overlay "24" at 388.19,340.55 h30 r270; Top Overlay "23" at 92.91,340.55 h30 r270; Top Overlay "2" at 388.19,1431.1 h30 r270; Top Overlay "1" at 185.43,1494.49 h30 r270
J5: Top Overlay "1" at 2962.6,1801.18 h30 r270; Top Overlay "2" at 3061.02,1811.02 h30 r270; Top Overlay "4" at 3061.02,1525.59 h30 r270; Top Overlay "3" at 2960.63,1525.59 h30 r270
J6: Top Overlay "1" at 2972.44,1013.78 h30 r270; Top Overlay "2" at 3070.87,1023.62 h30 r270; Top Overlay "4" at 3070.87,738.19 h30 r270; Top Overlay "3" at 2972.44,738.19 h30 r270
J7: Mechanical 1 "J1" at 3704.8,1614.43 h30 r90
J8: Mechanical 1 "J1" at 3699,722.43 h30 r90
J9: Mechanical 1 "J1" at 2539.43,-189 h30